# EAGLE board module_HC05 (EAGLE 9.0.1)
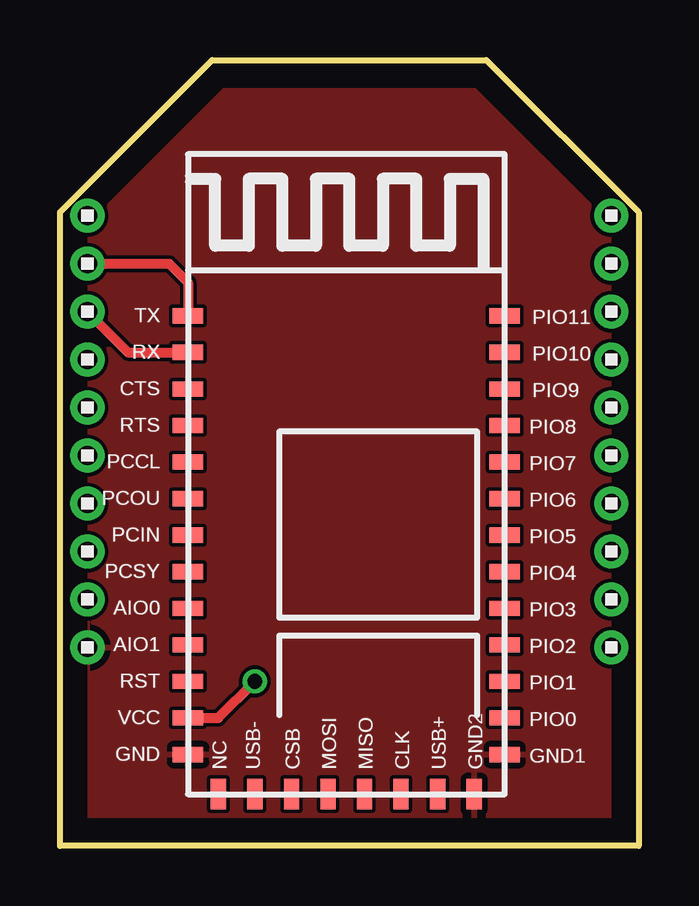
[diagram p0: board, top side]
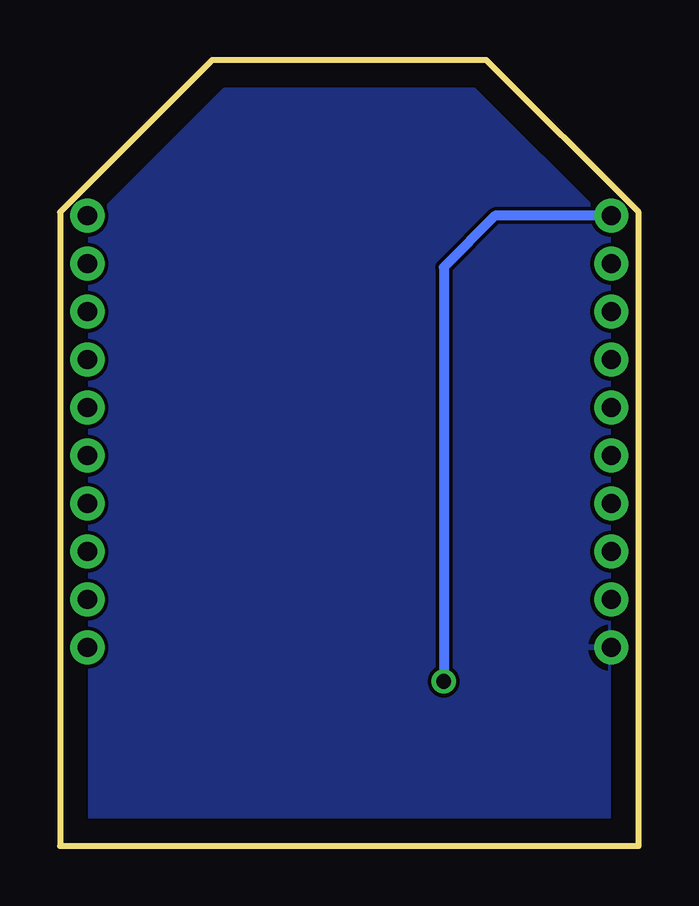
[diagram p1: board, bottom side, seen from below]

Size 24.13 x 32.77 mm. Coordinates in mm from the lower left corner, seen from the top.
Outline: 0,0 0,26.42 6.35,32.77 17.78,32.77 24.13,26.42 24.13,0 0,0
Copper layers (1*16): Top 0.035mm / dielectric 1.5mm / Bottom 0.035mm
Design rules "default": minimum track width 6mil, minimum drill 0.35mm, track to track 6mil, track to pad 6mil, pad to pad 6mil, via to via 6mil, smd to smd 6mil, copper to edge 40mil, drill to drill 6mil, minimum pad ring 10mil, minimum via ring 8mil, stop-mask expansion 4mil, vias tented up to drill 0mil, thermal gap 10mil

## Footprints (pad centres in the part's own frame; a part is rotated, then mirrored left to right if it is on the bottom)
SMD0,65-1,27 = smd 0.635 x 1.27: 1 0,0
1X10 = drill 0.8 pad 1.422: 1 -9,0; 2 -7,0; 3 -5,0; 4 -3,0; 5 -1,0; 6 1,0; 7 3,0; 8 5,0; 9 7,0; 10 9,0

## Placement (x,y rotation side)
AIO0  [SMD0,65-1,27]  5.33,9.91 270 top
AIO1  [SMD0,65-1,27]  5.33,8.38 270 top
CLK  [SMD0,65-1,27]  14.22,2.16 180 top
CSB  [SMD0,65-1,27]  9.65,2.16 180 top
CTS  [SMD0,65-1,27]  5.33,19.05 90 top
GND  [SMD0,65-1,27]  5.33,3.81 270 top
GND1  [SMD0,65-1,27]  18.54,3.81 90 top
GND2  [SMD0,65-1,27]  17.27,2.16 180 top
LEFT1  1X10  [1X10]  1.14,17.27 270 top
MISO  [SMD0,65-1,27]  12.7,2.16 180 top
MOSI  [SMD0,65-1,27]  11.18,2.16 180 top
NC  [SMD0,65-1,27]  6.6,2.16 180 top
PCCL  [SMD0,65-1,27]  5.33,16 90 top
PCIN  [SMD0,65-1,27]  5.33,12.95 270 top
PCOU  [SMD0,65-1,27]  5.33,14.48 90 top
PCSY  [SMD0,65-1,27]  5.33,11.43 270 top
PIO0  [SMD0,65-1,27]  18.54,5.33 90 top
PIO1  [SMD0,65-1,27]  18.54,6.86 90 top
PIO2  [SMD0,65-1,27]  18.54,8.38 90 top
PIO3  [SMD0,65-1,27]  18.54,9.91 90 top
PIO4  [SMD0,65-1,27]  18.54,11.43 90 top
PIO5  [SMD0,65-1,27]  18.54,12.95 90 top
PIO6  [SMD0,65-1,27]  18.54,14.48 90 top
PIO7  [SMD0,65-1,27]  18.54,16 90 top
PIO8  [SMD0,65-1,27]  18.54,17.53 90 top
PIO9  [SMD0,65-1,27]  18.54,19.05 90 top
PIO10  [SMD0,65-1,27]  18.54,20.57 90 top
PIO11  [SMD0,65-1,27]  18.54,22.1 90 top
RIGHT1  1X10  [1X10]  22.99,17.27 270 top
RST  [SMD0,65-1,27]  5.33,6.86 270 top
RTS  [SMD0,65-1,27]  5.33,17.53 90 top
RX  [SMD0,65-1,27]  5.33,20.57 90 top
TX  [SMD0,65-1,27]  5.33,22.1 90 top
USB+  [SMD0,65-1,27]  15.75,2.16 180 top
USB-  [SMD0,65-1,27]  8.13,2.16 180 top
VCC  [SMD0,65-1,27]  5.33,5.33 270 top

## Library data of the parts
AIO0 AIO1 CLK CSB CTS GND GND1 GND2 MISO MOSI NC PCCL PCIN PCOU PCSY PIO0 PIO1-PIO11 RST RTS RX TX USB+ USB- VCC = wirepad
LEFT1 RIGHT1 = headers(2mm)

## Nets
GND: GND1.1 GND2.1 GND.1 LEFT1.10
UART_RX: LEFT1.3 RX.1
UART_TX: LEFT1.2 TX.1
VCC: LEFT1.1 VCC.1

## Tracks (layer width: path | path; a pad name or v marks a point on that pad's centre or on a via)
GND
  pour Top: -0.25,-0.25 24.38,-0.25 24.38,26.54 17.91,33.02 6.22,33.02 -0.25,26.54
  pour Bottom: -0.51,-0.51 24.64,-0.51 24.64,26.67 18.03,33.27 6.1,33.27 -0.51,26.67
UART_RX
  Top 0.406: LEFT1.3 2.84,20.57 RX.1
UART_TX
  Top 0.406: TX.1 5.33,23.5 4.56,24.27 LEFT1.2
VCC  (via drill 0.61)
  Top 0.406: VCC.1 6.6,5.33 v8.13,6.86
  Bottom 0.406: v8.13,6.86 8.13,24.13 5.99,26.27 LEFT1.1

## Text on the board
_tNames: TX | PIO11 | RX | CTS | PIO10 | PIO9 | RTS | PIO8 | PCCL | PIO7 | PCOU | PIO6 | PCIN | PIO5 | PCSY | PIO4 | AIO0 | PIO3 | AIO1 | PIO2 | RST | PIO1 | VCC | PIO0 | GND | GND | NC | USB- | CSB | MOSI | MISO | CLK | USB+ | GND
_tDocu: PWR: / LOG: | 3.3 V / 3.3 V